# EAGLE board ClassD-v3 (EAGLE 7.6.0)
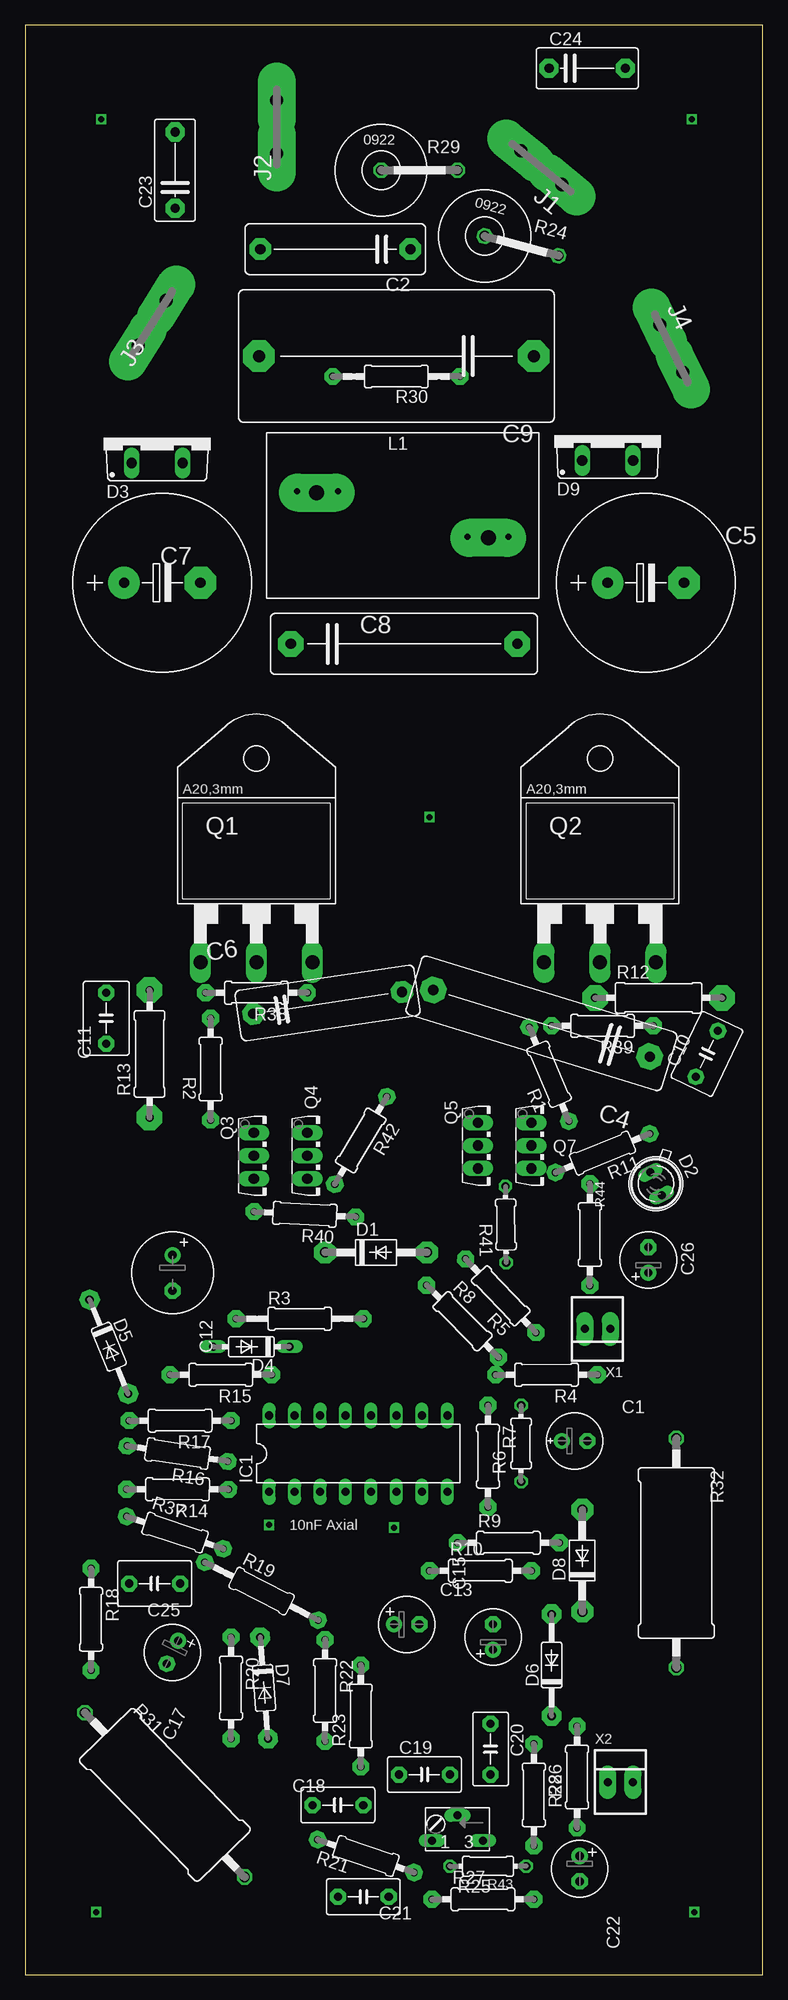
[diagram p0: board, top side]
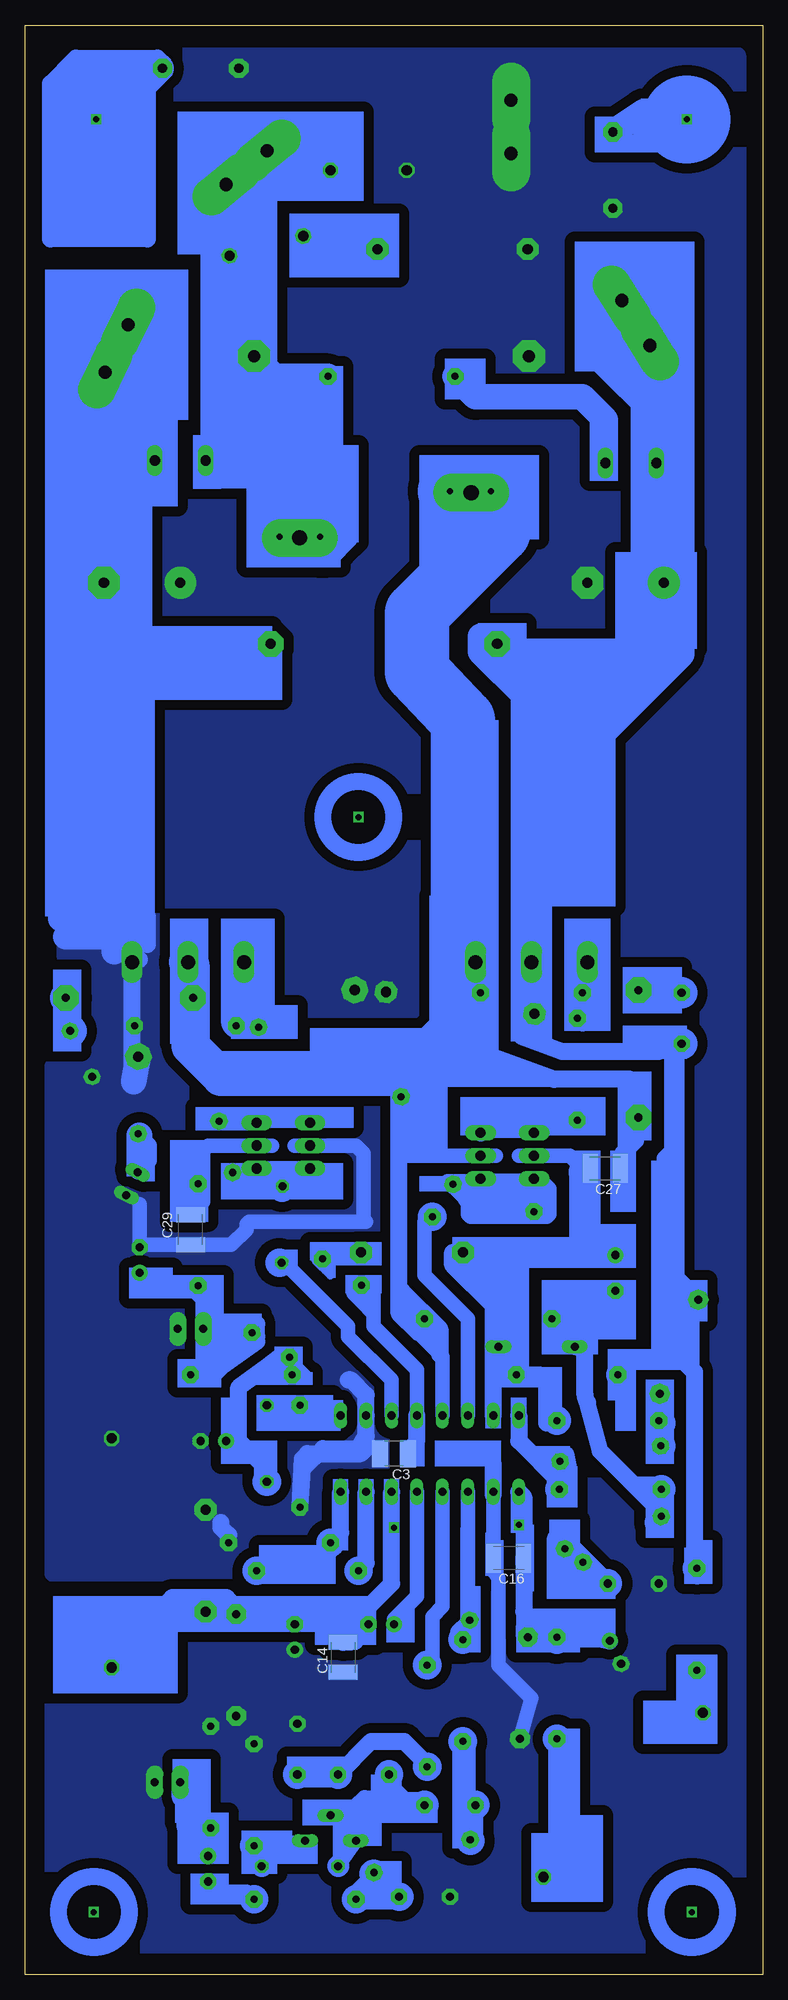
[diagram p1: board, bottom side, seen from below]

Size 73.64 x 194.49 mm. Coordinates in mm from the lower left corner, seen from the top.
Outline: 73.64,194.49 0,194.49 0,0 73.64,0 73.64,194.49
Copper layers (1*16): Top 0.035mm / dielectric 1.5mm / Bottom 0.035mm
Design rules "default": minimum track width 10mil, minimum drill 24mil, track to track 8mil, track to pad 8mil, pad to pad 8mil, via to via 8mil, smd to smd 8mil, copper to edge 40mil, drill to drill 8mil, minimum pad ring 10mil, minimum via ring 8mil, stop-mask expansion 4mil, vias tented up to drill 0mil, thermal gap 10mil

## Footprints (pad centres in the part's own frame; a part is rotated, then mirrored left to right if it is on the bottom)
E2,5-6E = drill 0.813 pad 1.575: + -1.27,0 | drill 0.813 pad 1.575 octagon: - 1.27,0
C15B5 = drill 1.016 pad 2.159 octagon: 1 -7.493,0; 2 7.493,0
C1210 = smd 1.6 x 2.7: 1 -1.4,0; 2 1.4,0
C22.5B6 = drill 1.016 pad 2.54 octagon: 1 -11.303,0; 2 11.303,0
E7,5-18 = drill 1.016 pad 3.15: + -3.81,0 | drill 1.016 pad 3.15 octagon: - 3.81,0
C27.5B13 = drill 1.194 pad 3.15 octagon: 1 -13.716,0; 2 13.716,0
C5B4.5 = drill 0.813 pad 1.6 octagon: 1 -2.54,0; 2 2.54,0
E3,5-8 = drill 0.813 pad 1.6: + -1.778,0 | drill 0.813 pad 1.6 octagon: - 1.778,0
E2,5-6 = drill 0.813 pad 1.6: + -1.27,0 | drill 0.813 pad 1.6 octagon: - 1.27,0
C1210K = smd 1.5 x 2.9: 1 -1.5,0; 2 1.5,0
C5B3.5 = drill 0.813 pad 1.6 octagon: 1 -2.54,0; 2 2.54,0
C7.5B4 = drill 0.914 pad 1.905 octagon: 1 -3.81,0; 2 3.81,0
DO41-10 = drill 1 pad 2.184 octagon: A 5.08,0; C -5.08,0
SFH482 = drill 0.813 long: A -1.27,0; K 1.27,0
TO220ACS = drill 1.016 long: A 2.54,-2.54; C -2.54,-2.54
DO35-7 = drill 0.813 long: A 3.81,0; C -3.81,0
DO35-10 = drill 0.813 pad 1.93 octagon: A 5.08,0; C -5.08,0
DIL16 = drill 0.813 long: 1 -8.89,-3.81; 2 -6.35,-3.81; 3 -3.81,-3.81; 4 -1.27,-3.81; 5 1.27,-3.81; 6 3.81,-3.81; 7 6.35,-3.81; 8 8.89,-3.81; 9 8.89,3.81; 10 6.35,3.81; 11 3.81,3.81; 12 1.27,3.81; 13 -1.27,3.81; 14 -3.81,3.81; 15 -6.35,3.81; 16 -8.89,3.81
F061.040 = drill 1.3 pad 3.81 long: A1 -2.65,0; A2 2.65,0
SFT1040 = drill 1.5 pad 3.81 long: 1 5.99,5; 2 10.508,22.12
TOP3 = drill 1.397 long: 1 -5.588,-7.62; 2 0,-7.62; 3 5.588,-7.62
TO126AV = drill 1.016 long: B 2.286,-1.27; C 0,-1.27; E -2.286,-1.27
0207/10 = drill 0.7 pad 1.676 octagon: 1 -5.08,0; 2 5.08,0
0207/12 = drill 0.7 pad 1.676 octagon: 1 -6.35,0; 2 6.35,0
0204/7 = drill 0.813 octagon: 1 -3.81,0; 2 3.81,0
0309/12 = drill 0.813 pad 2.54 octagon: 1 -6.35,0; 2 6.35,0
0922V = drill 1.016 octagon: 1 -5.08,0; 2 2.54,0
B64W = drill 0.813 long: A 2.54,0; E -2.54,0; S 0,-2.54
P0817/22 = drill 1.016 octagon: 1 -11.43,0; 2 11.43,0
22-23-2021 = drill 0.8 pad 1.676 long: 1 -1.27,0; 2 1.27,0

## Placement (x,y rotation side)
C1  10uF  [E2,5-6E]  54.84,53.26 0 top
C2  .1  [C15B5]  30.97,172.14 180 top
C3  .1  [C1210]  36.81,51.99 180 bottom
C4  .1  [C22.5B6]  51.54,94.92 162.9 top
C5  330u + .47uF 250v  [E7,5-18]  61.96,138.86 0 top
C6  .1  [C15B5]  30.21,96.95 8.4 top
C7  330u + .47uF 250v  [E7,5-18]  13.7,138.86 0 top
C8  .22 600v  [C22.5B6]  37.83,132.77 0 top
C9  2u2  [C27.5B13]  37.06,161.47 180 top
C10  220pF  [C5B4.5]  68.05,91.87 64.4 top
C11  220pF  [C5B4.5]  8.11,95.43 90 top
C12  22uF  [E3,5-8]  14.71,70.03 270 top
C13  22uF  [E2,5-6]  38.08,34.98 0 top
C14  .1  [C1210K]  41.89,31.67 90 bottom
C15  47uF  [E2,5-6]  46.72,33.71 90 top
C16  .1  [C1210K]  25.38,41.58 180 bottom
C17  47uF  [E2,5-6]  14.71,32.18 243.5 top
C18  1n  [C5B3.5]  31.22,16.94 180 top
C19  1n  [C5B3.5]  39.86,19.99 0 top
C20  1n  [C5B3.5]  46.46,22.53 270 top
C21  2n2  [C5B3.5]  33.76,7.8 0 top
C22  22u BP  [E2,5-6]  55.35,10.59 270 top
C23  1nF  [C7.5B4]  14.97,180.01 90 top
C24  1nF  [C7.5B4]  56.11,190.17 0 top
C25  150pF  [C5B4.5]  12.93,39.04 180 top
C26  10uF  [E2,5-6]  62.21,71.3 90 top
C27  2u2  [C1210K]  15.73,80.44 180 bottom
C29  2u2  [C1210K]  57.13,74.35 90 bottom
D1  MUR120  [DO41-10]  35.03,72.06 0 top
D2  LED  [SFH482]  62.97,78.92 296.5 top
D3  MURF860  [TO220ACS]  13.19,153.34 0 top
D4  18v  [DO35-7]  22.59,62.66 180 top
D5  MUR120  [DO35-10]  8.36,62.66 292.3 top
D6  5V6  [DO35-10]  52.56,30.91 90 top
D7  5V6  [DO35-10]  23.86,28.63 274.4 top
D8  4007  [DO41-10]  55.61,41.33 90 top
D9  MURF860  [TO220ACS]  58.15,153.59 0 top
IC1  IRS2092  [DIL16]  33.25,51.99 0 top
J1  OUT  [F061.040]  51.54,180.26 140.7 top
J2  GND  [F061.040]  25.13,184.33 270 top
J3  VCC+  [F061.040]  12.68,164.77 237.9 top
J4  VEE-  [F061.040]  64.5,162.23 295.8 top
L1  VER2923-223  [SFT1040]  24.11,153.85 270 top
Q1  IRFP4227  [TOP3]  23.09,108.64 0 top
Q2  IRFP4227  [TOP3]  57.38,108.64 0 top
Q3  C2690A  [TO126AV]  24.11,81.71 270 top
Q4  A1220A  [TO126AV]  29.44,81.71 270 top
Q5  A1220A  [TO126AV]  46.46,82.73 270 top
Q7  C2690A  [TO126AV]  51.8,82.73 270 top
R1  4R7  [0207/10]  52.3,89.84 113 top
R2  4R7  [0207/10]  18.52,90.35 90.1 top
R3  0R  [0207/12]  27.41,65.46 0 top
R4  10  [0207/10]  52.05,59.87 180.1 top
R5  4R7  [0207/10]  47.48,67.74 133.7 top
R6  NC  [0204/7]  49.51,53.01 90 top
R7  0R  [0207/10]  46.21,51.74 270 top
R8  0  [0207/10]  43.67,65.2 315 top
R9  2k2  [0207/10]  48.24,43.1 0 top
R10  6k8  [0207/10]  45.45,40.31 0 top
R11  10k  [0207/10]  57.64,81.97 202.3 top
R12  10 .5W  [0309/12]  63.23,97.46 0 top
R13  10 .5W  [0309/12]  12.43,91.87 90 top
R14  6k8  [0207/10]  15.22,48.44 179.8 top
R15  47k  [0207/10]  19.54,59.87 180 top
R16  3k9  [0207/10]  15.22,51.99 171.2 top
R17  10K  [0207/10]  15.47,55.3 180 top
R18  0R  [0207/10]  6.58,35.48 270 top
R19  120k  [0207/12]  23.6,38.28 333 top
R20  0R  [0207/10]  20.55,28.63 270 top
R21  11.52k  [0207/10]  34.02,11.86 341.1 top
R22  0R  [0207/10]  29.95,28.37 270 top
R23  0R  [0207/10]  33.51,25.83 90 top
R24  10 10w  [0922V]  50.78,172.14 345.1 top
R25  1k  [B64W]  43.16,13.39 180 top
R26  330R  [0207/10]  50.78,17.96 270 top
R27  1k  [0207/10]  45.7,7.54 0 top
R28  100k  [0207/10]  55.1,19.74 90 top
R29  2k2  [0922V]  40.62,180.01 0 top
R30  J1  [0207/12]  37.06,159.44 180 top
R31  4K7 5W  [P0817/22]  13.95,17.96 314.2 top
R32  4K7 5W  [P0817/22]  65,42.09 270 top
R37  1K 1W  [0207/10]  14.97,44.12 341.5 top
R38  10K  [0207/10]  23.09,97.97 180 top
R39  10K  [0207/10]  57.64,94.67 180 top
R40  10  [0207/10]  27.92,75.87 177 top
R41  10  [0204/7]  47.99,74.85 90.6 top
R42  10k  [0207/10]  33.51,83.24 239.3 top
R43  1k  [0204/7]  46.21,10.85 180 top
R44  0R  [0207/10]  56.37,73.84 270 top
X1  12v  [22-23-2021]  57.13,64.44 180 top
X2  IN  [22-23-2021]  59.42,19.23 0 top

## Library data of the parts
C1 C3 C5 C7 C12-C17 C22 C26 C27 C29 R1-R24 R26-R32 R37-R44 = resistor
C2 C4 C6 C8-C11 C18-C21 C23-C25 = capacitor-wima
D1 D3-D9 = diode
D2 = led
IC1 = ic-package
J1-J4 = con-faston; OC_FARNELL: unknown; OC_NEWARK: unknown
L1 = inductors
Q1 Q2 = transistor-fet
Q3-Q5 Q7 = transistor-power
R25 = pot
X1 X2 = con-molex; MF: MOLEX; MPN: 22-23-2021; OC_FARNELL: 1462926; OC_NEWARK: 25C3832

## Nets
COM: C1.- C3.2 C4.1 C5.- C8.2 C10.1 C26.- C29.1 D2.K D8.A D9.A IC1.10 J4.A1 J4.A2 Q2.3 Q5.C R7.2 R9.2 R32.1 R39.1 X1.1
N$1: Q1.1 R2.2 R38.2
N$3: Q2.1 R1.2 R39.2
N$4: IC1.8 R9.1 R10.2
N$5: C6.1 C7.+ C8.1 C11.1 D3.C D5.C J3.A1 J3.A2 Q1.2 R15.2 R18.1
N$6: IC1.14 R40.1
N$7: IC1.11 R41.1
N$8: D1.A R5.2
N$9: C2.1 R24.1
N$10: C3.1 IC1.12 R8.1
N$11: C12.+ C27.2 D1.C D4.C IC1.15 Q3.C R15.1 R17.1
N$12: IC1.9 R6.2 R7.1
N$13: C1.+ R4.2 R6.1 R8.2
N$15: C11.2 R13.2
N$16: Q3.E Q4.E R2.1
N$17: R25.E R26.2 R43.1
N$18: C26.+ R4.1 R5.1 R44.2 X1.2
N$19: IC1.7 R10.1
N$21: C10.2 R12.2
N$22: IC1.16 R14.1 R16.1
N$23: D5.A R16.2 R17.2
N$24: C13.+ IC1.5
N$25: C25.1 R19.1 R37.2
N$26: IC1.3 R19.2 R22.1
N$27: C18.1 C19.1 R25.A R25.S R43.2
N$28: C19.2 C20.2 R23.1
N$29: C18.2 R21.1 R22.2
N$30: IC1.4 R23.2
N$31: R18.2 R31.1
N$32: C21.2 R21.2 R27.1
N$33: C22.- R27.2
N$34: C22.+ R28.1 X2.1
N$35: C24.2
N$37: R20.2 R31.2
N$39: C13.- C14.2 C15.- D6.A D8.C IC1.6 R32.2
N$40: C12.- D4.A R3.1 R14.2 R37.1
N$41: C27.1 IC1.13 L1.1 Q1.3 Q2.2 Q4.C R3.2 R12.1 R13.1 R38.1 R42.1
N$43: Q5.B Q7.B R11.2 R41.2
N$44: Q3.B Q4.B R40.2 R42.2
N$45: C29.2 Q7.C R44.1
N$47: Q5.E Q7.E R1.1
N$49: D2.A R11.1
N$50: C9.1 D9.C J1.A1 J1.A2 L1.2 R24.2 R29.2 R30.1
N$51: D3.A R30.2
N$53: C23.2
PGND: C2.2 C4.2 C5.+ C6.2 C7.- C9.2 C14.1 C15.+ C16.2 C17.- C20.1 C21.1 C23.1 C24.1 C25.2 D6.C D7.A IC1.2 J2.A1 J2.A2 R26.1 R28.2 R29.1 X2.2
PGND1: C16.1 C17.+ D7.C IC1.1 R20.1

## Tracks (layer width: path | path; a pad name or v marks a point on that pad's centre or on a via)
COM
  Bottom 1.422: Q5.C 42.91,82.73 | 46.72,82.73 Q5.C | Q5.C 40.62,82.73 39.86,81.97 39.86,75.36 39.6,75.11 51.29,75.11 51.54,74.85 51.54,74.35 53.07,72.82 61.96,72.82 C26.- 62.21,76.89
  Bottom 1.676: IC1.10 39.6,53.77 40.37,52.5 43.92,52.5 45.95,50.47 R7.2 45.95,51.49 45.45,51.99 40.11,51.99 39.6,52.5 39.6,57.84 41.13,59.36 41.38,59.36 | R9.2 53.32,43.87 54.08,44.63 54.08,45.14 | C4.1 62.97,89.14 62.97,101.27 62.21,101.27 | 64.5,102.54 64.5,103.56 | 65.51,103.56 65.51,105.59 65.26,105.59 65.26,103.81 64.24,103.81 64.24,105.59 63.99,105.59 63.99,104.06 62.72,104.06 62.72,105.59 62.46,105.59 62.46,103.05 61.7,103.05 61.7,105.59 61.45,105.59 61.45,102.79 | C5.- 63.48,134.29 | 64.5,125.4 64.24,125.4 62.21,125.4 62.21,125.91
  Bottom 2.54: 62.81,89.08 C4.1 | C8.2 51.92,130.73 62.97,130.73 | 62.97,130.73 63.48,131.24 63.48,134.29 | 62.21,125.91 62.97,126.67 62.97,130.73 | J4.A1 62.83,157.54 | 62.83,157.54 65,153.34 65,150.29 | 65,150.29 C5.- | D9.A 65,150.29 | 62.83,157.54 62.85,159.59 J4.A2 | 64.24,125.4 64.24,111.68 70.08,105.33 70.08,111.43 70.34,107.11 69.07,105.84 69.07,111.43 68.81,111.68 68.81,107.87 66.78,105.84 66.78,110.92 66.53,111.18 66.53,108.64 63.99,106.1 63.99,110.16 65.51,111.68 62.46,111.68 61.96,111.18 61.96,106.1 64.5,103.56 69.58,103.56 68.31,104.83 67.54,104.83 | 64.5,102.54 64.75,102.29 64.75,102.03
  pour Bottom (isolate 1.016, no thermals): 52.56,40.06 70.85,40.06 70.85,90.6 67.29,90.6 70.34,105.08 49.26,105.08 40.37,104.57 36.81,78.66 37.57,44.37 51.29,44.37
N$1
  Bottom 1.676: Q1.1 17.51,97.97 R38.2 18.01,94.96 R2.2 18,95.94
  Bottom 1.93: Q1.1 18.01,100.51
N$2
  Bottom 1.676: 54.34,60.63 50.53,63.68 50.53,64.95 51.29,64.95 50.53,63.17 54.84,60.12
N$3
  Bottom 1.422: 51.54,95.68 51.54,96.44 51.8,96.7 51.8,97.71
  Bottom 1.676: 48.24,95.43 50.53,95.43 | R39.2 51.54,95.68 R1.2 | 50.02,95.68 R1.2 | R1.2 50.53,95.43 | R1.2 50.78,95.43 50.53,95.43
  Bottom 1.93: 51.8,97.71 Q2.1
N$4
  Bottom 1.676: R10.2 45.19,40.31 43.16,42.34 R9.1 42.14,44.12 IC1.8
N$5
  Bottom 1.422: 8.87,92.13 9.12,91.87 9.12,82.22 9.89,81.46 9.89,79.68 8.87,78.66 8.87,72.31 | 23.09,111.68 23.09,111.43 23.09,110.16 Q1.2
  Bottom 1.676: Q1.2 23.09,94.35 C6.1 23.24,95.68 22.33,95.68 24.11,93.65 20.05,92.13 10.39,92.13 | 10.39,92.13 C11.1 | 10.39,61.65 10.14,61.9 D5.C 10.14,71.04 8.87,72.31 | 8.87,92.13 9.12,92.38 10.14,92.38 10.39,92.13 | 10.39,61.65 8.36,61.65 6.84,60.12 6.84,40.06 6.58,39.8 R18.1 | 10.39,61.65 10.65,61.39 13.7,61.39 13.7,60.38 13.95,60.38 R15.2
  Bottom 2.54: 23.09,111.43 23.6,111.43 23.6,127.43 28.17,132 28.17,133.53 C8.1 | 20.81,124.89 20.81,120.57 | 20.81,120.57 20.81,110.41 21.06,110.16 23.09,110.16 | 20.81,120.57 19.28,120.57 8.11,131.75 8.11,133.02 10.39,135.31 C7.+ 8.11,141.4 8.11,150.8 | J3.A2 13.19,163.4 13.19,162.99 12.68,162.99 11.92,165.61 13.42,167.46 | 8.11,150.8 8.11,156.13 9.89,154.86 16.74,161.72 16.74,166.04 15.32,167.46 13.42,167.46 | D3.C 8.11,150.8 | J3.A1 13.42,167.46
N$6
  Bottom 1.422: IC1.14 29.44,65.46 33.76,69.77 33.76,75.11 33.27,75.6 R40.1
N$7
  Bottom 1.422: IC1.11 37.06,59.36 41.38,63.68 41.38,64.69 47.48,70.79
  Bottom 1.676: 47.48,70.79 48.24,70.79 48.31,70.86 R41.1
N$8
  Bottom 0.813: 44.09,71.3 R5.2 43.83,71.55 42.91,71.55 43.41,72.06 44.68,72.06 44.68,71.3 43.16,69.77 43.16,71.04 43.92,71.04 43.67,70.79 | 43.67,70.79 43.67,70.28 | 43.67,70.79 43.67,71.55 43.16,72.06 D1.A
N$9
  Bottom 2.54: C2.1 39.77,173.44 R24.1
N$10
  Bottom 1.422: R8.1 40.62,68.76 40.87,68.76 40.87,68 40.11,67.23 | IC1.12 34.52,60.38 38.84,64.69 38.84,65.96 | 39.6,68.32 39.42,68.5 38.84,68.5 38.84,68.32 | 38.84,68.32 38.84,65.96 | 38.84,65.96 40.11,67.23 | 40.11,67.23 40.11,68.76 | 38.84,68.32 38.91,68.25 39.86,68.25
  Bottom 1.676: C3.1 34.52,53.29 IC1.12
N$11
  Bottom 1.016: 21.57,58.6 21.82,58.85 21.82,59.87 22.1,60.15 25.32,60.15
  Bottom 1.422: 18.52,79.93 18.52,80.95 19.28,81.71 Q3.C 24.36,81.71 | C12.+ 14.97,72.06 18.52,72.06
  Bottom 1.676: D1.C 30.97,72.06 | 26.9,66.73 30.97,70.79 30.97,72.06 | 30.97,72.06 30.71,71.81 30.21,71.81 | IC1.15 26.9,59.87 | 26.9,59.87 26.9,66.73 | 26.9,59.87 R15.1 25.32,60.15 25.89,60.38 D4.C | R17.1 21.57,55.04 21.57,58.6 | 26.9,66.73 24.36,69.27 24.36,71.81 C12.+ | 18.52,72.06 18.52,79.93 18.52,80.19 18.27,80.44 C27.2 17.48,77.67
N$12
  Bottom 0.813: IC1.9 45.95,55.8
  Bottom 1.676: R6.2 46.97,56.82 | 46.97,56.82 R7.1 | 45.95,55.8 46.97,56.82
N$13
  Bottom 0.813: 46.46,62.15 47.01,61.61 R8.2 47.26,59.9 47.22,59.87 45.7,59.87 45.45,59.61 45.45,59.87 46.46,60.88 46.46,61.39 48.06,61.39 48.28,61.61
  Bottom 1.422: C1.+ 52.3,53.26
  Bottom 1.676: R6.1 49.51,50.47 52.3,53.26 52.3,58.6 49.38,60.76 | 49.38,60.76 48.28,61.61 | R4.2 49.38,60.49 49.38,60.76
N$14  (via drill 0.6)
  other vias: 24.36,44.88
N$15
  Bottom 1.676: R13.2 C11.2
N$16
  Bottom 1.422: R2.1 21.57,85.27 Q3.E 23.35,84.51 23.35,85.78
  Bottom 1.676: Q4.E 27.16,85.78 23.35,85.78 | 16.74,85.27 R2.1
N$17
  Bottom 0.813: R25.E 47.73,13.13
  Bottom 1.422: R43.1 50.02,12.37 | 47.73,13.13 49.26,13.13 49.26,12.37 46.21,12.37
  Bottom 1.676: 49.26,12.37 50.02,12.37 R26.2
N$18
  Bottom 0.813: 53.18,65.08 X1.2 55.35,64.69
  Bottom 1.422: C26.+ 61.19,69.01 R44.2
  Bottom 1.676: 53.18,65.08 R5.1 50.73,63.98 54.34,60.38 54.83,59.87 R4.1 56.87,60.12 | R44.2 56.88,68.5 55.35,66.98 55.35,64.69 55.61,64.69
N$19
  Bottom 1.676: R10.1 39.6,41.07 IC1.7
N$20  (via drill 0.6)
  other vias: 7.09,6.27
N$21
  Bottom 1.676: R12.2 69.07,96.44 C10.2
N$22
  Bottom 1.422: R16.1 20.3,51.53 20.3,51.99 19.54,51.99 19.28,50.47 20.3,49.2
  Bottom 1.676: IC1.16 24.36,53.26 20.3,49.2 20.3,47.66 R14.1
N$23
  Bottom 1.676: R16.2 R17.2 D5.A
N$24
  Bottom 1.422: IC1.5 34.52,37.77 36.81,35.48 C13.+ 36.3,34.47
N$25
  Bottom 1.422: 17.51,39.8 15.98,39.8 18.78,42.6 20.55,42.6 | 20.05,39.29 20.48,39.59
  Bottom 1.676: R37.2 20.55,42.6 20.55,39.55 20.48,39.59 R19.1 | C25.1 20.05,39.29
N$26
  Bottom 0.406: R19.2 29.44,38.53 29.44,36.5
  Bottom 1.422: 29.95,34.72 R22.1 30.21,33.45 30.46,33.71 30.46,34.21 29.44,35.23 29.44,36.5 29.44,47.93 IC1.3
N$27
  Bottom 1.422: 44.43,15.93 44.18,15.67 43.41,15.67 | 40.49,16.82 40.49,13.39 R25.A R43.2
  Bottom 1.676: C19.1 37.32,18.97 35.92,17.58 | 35.92,17.58 35.29,16.94 C18.1 | 35.92,17.58 39.73,17.58 40.49,16.82 40.87,16.43 43.92,16.43 44.43,15.93 R25.S
N$28
  Bottom 1.676: R23.1 33.51,21.01 35.79,23.29 39.1,23.29 C19.2 C20.2
N$29
  Bottom 1.676: R21.1 29.95,14.91 29.95,16.94 | 29.95,16.94 R22.2 | C18.2 29.95,16.94
N$30
  Bottom 1.422: R23.2 33,31.42 33,35.74 31.98,36.75 IC1.4
N$31
  Bottom 1.93: R18.2 R31.1
N$32
  Bottom 1.422: 38.33,9.83 38.08,9.58 38.08,9.07 40.11,7.04 R27.1 | R27.1 40.87,7.8 40.87,8.05 40.62,8.31 | 38.59,10.34 40.62,8.31 | 40.62,8.31 R27.1
  Bottom 1.676: C21.2 38.33,10.08 | 38.33,10.08 R21.2 | 38.33,9.83 38.33,10.08
N$33
  Bottom 1.422: R27.2 51.54,8.31 54.34,8.31 C22.-
N$34
  Bottom 1.422: C22.+ R28.1
  Bottom 1.676: 58.15,18.21 X2.1 58.15,17.7 57.64,17.2 57.64,14.66 R28.1
N$35  (via drill 0.6)
  Bottom 1.676: C24.2 61.45,188.65 61.45,188.14 | 61.45,188.14 61.45,185.34 | 61.45,185.34 61.45,173.15 71.1,173.15 71.1,188.65 68.56,191.19 60.43,191.19 59.67,190.42 59.67,189.92 61.45,188.14 | 66.78,185.34 v66.53,185.09 61.45,185.34
N$36  (via drill 0.6)
  other vias: 66.78,6.27
N$37
  Bottom 1.676: R31.2 20.55,9.81 R20.2
  Bottom 1.93: R20.2 20.3,23.55
N$38  (via drill 0.6)
  other vias: 40.37,115.49
N$39
  Bottom 1.422: C13.- 40.62,34.47 | 40.62,34.47 40.62,35.99 | 40.62,35.99 39.86,35.99 39.86,36.25 | 40.62,35.99 41.38,35.99 | 41.13,33.2 40.62,33.2 40.62,34.47 | C15.- 46.46,35.23 46.46,35.99 | D6.A 52.3,36.25 | 52.3,36.25 49.51,36.25 | 52.3,36.25 52.56,36.5 | 59.92,36.5 62.21,36.5 R32.2
  Bottom 1.676: 39.86,36.25 37.06,39.04 IC1.6 | 41.13,33.2 41.89,33.2 C14.2 | D6.A 46.46,35.99 41.38,35.99 | D8.C 56.62,37.52
  Bottom 1.93: 59.92,36.5 58.91,37.52 56.62,37.52 53.57,37.52 52.56,36.5 | 49.26,36.5 49.51,36.25 49.76,35.99
N$40
  Bottom 1.676: 10.16,46.91 R14.2 10.39,46.68 10.39,46.41 | R37.1 10.39,46.41 | 10.39,46.41 16.24,52.25 17.51,57.07 17.76,57.84 17.76,62.41 | 17.76,62.41 17.76,62.92 | R3.1 18.01,64.95 | 18.01,64.95 17.25,64.95 16.74,65.46 15.73,65.46 C12.- | D4.A 18.01,62.66 | 18.01,62.66 18.01,64.95 | 18.01,62.66 17.76,62.41
N$41  (via drill 0.6)
  Bottom 0.813: 36.81,91.36 36.56,91.12
  Bottom 1.422: 26.65,81.71 Q4.C 36.3,81.71 | C27.1 13.95,80.97 13.95,81.97 | IC1.13 31.98,61.65 32.24,61.9 34.4,64.06 | R42.1 36.56,88.06 36.56,91.12
  Bottom 1.676: 36.05,68.25 32.24,64.44 32.24,61.9 | 36.3,89.08 36.3,81.71 36.3,65.96 34.4,64.06 R3.2 | 36.3,89.08 36.3,89.59 36.3,91.36 36.81,91.36 36.81,91.62 37.32,93.4 37.32,90.86 36.3,89.08 | R12.1 Q2.2 | 31.09,94.79 29.19,92.38 20.81,89.33 13.19,89.33 R13.1 12.68,87.3 12.68,83.24 13.95,81.97 | R38.1 28.68,97.97 28.68,100.51 | 33.76,90.35 33.76,90.6 34.52,91.36
  Bottom 1.93: 28.68,96.44 28.68,100.51
  Bottom 2.54: 29.95,107.11 28.68,105.84 28.68,100.51 | L1.1 28.96,148.01 28.17,148.01
  Bottom 3.81: Q2.2 57.13,100.76 57.13,92.63 54.08,89.59 36.3,89.59 34.52,91.36 31.09,94.79 29.95,95.94 28.68,95.94 28.68,100.51 Q1.3 28.68,101.78
  Bottom 6.452: v31.22,148.01 28.17,148.01 27.92,148.01 v27.16,148.01 26.65,148.01 26.4,147.75 26.4,143.94 34.52,135.81 34.52,129.97 29.95,125.15 29.95,107.11
N$43
  Bottom 1.422: R41.2 47.65,80.19 47.73,80.19 47.48,80.44 | 47.48,80.44 Q5.B | 47.48,80.44 Q7.B 50.53,79.68 52.58,79.68 R11.2
N$44
  Bottom 1.422: 29.44,76.89 29.44,75.87 29.19,75.62 21.57,75.62 21.32,75.87 21.32,78.41 22.08,79.17 23.09,79.17 | 29.44,77.14 29.44,76.89 | 29.44,76.89 29.95,77.65 | 29.95,77.65 31.48,79.17 28.43,79.17 Q4.B | Q4.B 27.41,79.43 | 23.09,79.17 23.35,78.92 27.92,78.92 | 27.92,78.92 28.17,79.17 Q4.B | R40.2 24.61,77.65 29.95,77.65 | 23.09,79.17 Q3.B | R42.2 30.46,78.41 28.43,78.41 27.92,78.92
N$45
  Bottom 1.422: 49,82.73 Q7.C 55.35,82.73 55.86,82.22 55.86,77.14 56.11,76.89 56.88,76.89 | 56.88,76.89 57.38,76.89 | C29.2 56.88,77.37 56.88,76.89
  Bottom 1.676: R44.1 57.38,76.89
N$46
  Bottom 1.676: 26.9,47.93 26.9,50.98 27.41,51.49
N$47
  Bottom 1.422: Q5.E 45.95,85.78 49.76,85.78 Q7.E 51.29,85.78 53.83,85.78 54.29,85.31 R1.1
N$48  (via drill 0.6)
  other vias: 36.81,44.63
N$49
  Bottom 1.422: R11.1 61.19,82.75 61.19,81.2 62.21,80.19 D2.A
N$50  (via drill 0.6)
  Bottom 2.54: v48.24,143.43 46.32,143.43 L1.2 45.76,142.87 | 45.76,142.87 44.55,141.66 43.41,141.66 41.64,143.43 41.64,145.21 41.89,145.47 45.7,145.47 | v44.18,143.43 44.74,142.87 45.76,142.87 | 45.7,145.47 45.7,156.39 48.37,159.06 | 48.37,159.06 C9.1 50.78,171.63 | D9.C 54.08,149.53 46.21,149.53 46.21,145.97 45.7,145.47 | R30.1 47.99,159.44 48.37,159.06 | 50.78,171.63 50.78,174.25 J1.A1 53.86,177.82 J1.A2 45.09,181.94 R29.2 | R24.2 53.09,171.63 50.78,171.63
N$51
  Bottom 2.54: R30.2 28.68,157.4 18.01,157.4 15.73,155.12 D3.A
N$53  (via drill 0.6)
  Bottom 2.54: C23.2 11.92,185.85 v7.6,185.09
PGND
  Bottom 1.422: IC1.2 26.88,48.18 C16.2 26.88,40.29 26.4,39.55 26.4,30.91 23.09,27.61 D7.A
  pour Bottom (isolate 1.016, no thermals): 70.85,169.09 70.85,191.44 2.52,191.44 2.52,2.97 70.85,2.97 70.85,40.06 44.94,42.85 59.92,108.64 59.67,169.09
PGND1
  Bottom 1.27: R20.1 20.05,34.21 19.79,34.21
  Bottom 1.676: IC1.1 23.86,47.68 23.86,40.31 | 23.86,40.31 23.86,36.25 22.33,34.72 D7.C 19.79,34.21 C17.+ | C16.1 23.86,40.31
(copper drawn outside any net)
  shapes: Bottom area x449, Bottom circle x57

## Text on the board
Dimension: Gain = 9.5x
tNames: 10nF Axial